# EAGLE board nano-addon-board (EAGLE 9.0.1)
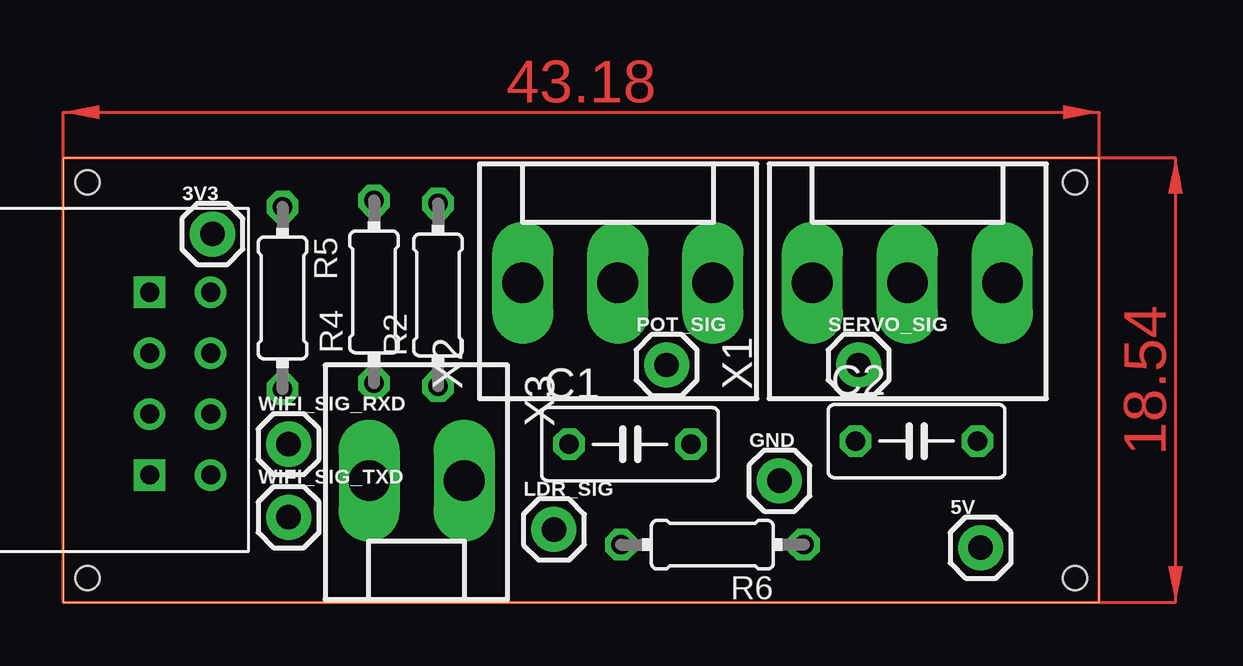
[diagram p0: board, top side]
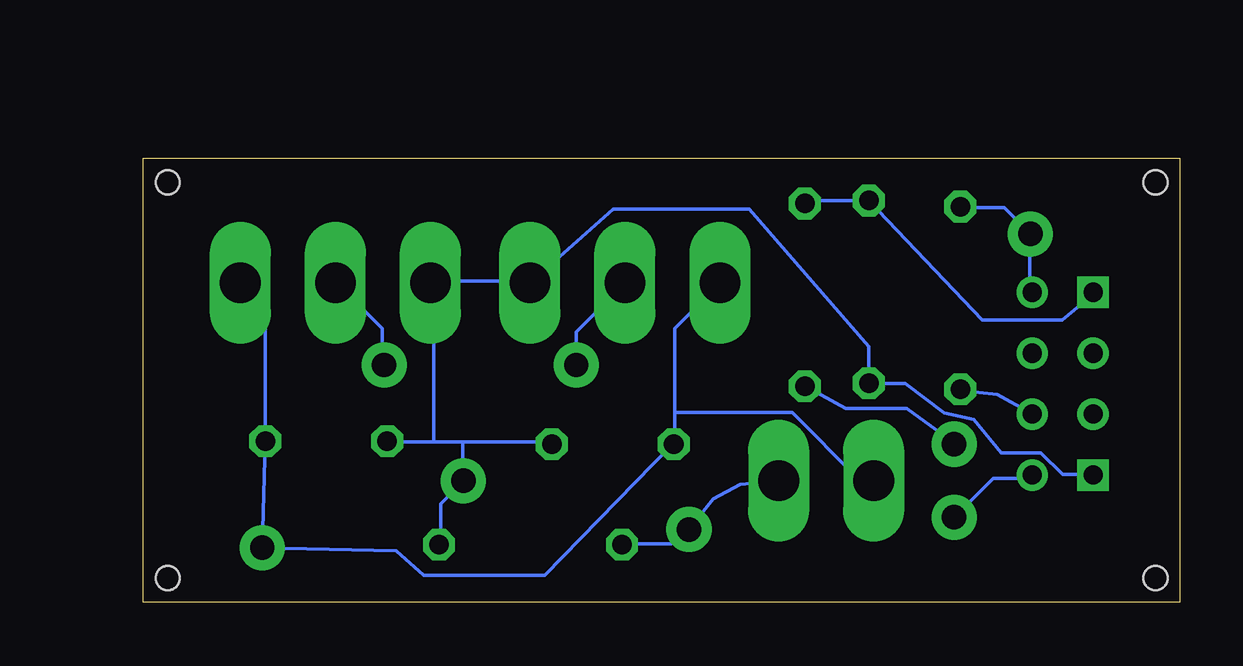
[diagram p1: board, bottom side, seen from below]

Size 43.18 x 18.53 mm. Coordinates in mm from the lower left corner, seen from the top.
Outline: 0,0 43.18,0 43.18,18.53 0,18.53 0,0
Copper layers (1*16): Top 0.035mm / dielectric 1.5mm / Bottom 0.035mm
Design rules "default *": minimum track width 6mil, minimum drill 0.3mm, track to track 6mil, track to pad 6mil, pad to pad 6mil, via to via 6mil, smd to smd 6mil, copper to edge 40mil, drill to drill 6mil, minimum pad ring 10mil, minimum via ring 8mil, stop-mask expansion 4mil, vias tented up to drill 0mil, thermal gap 10mil
Net classes: 0 default: width 0.152 mm, drill 0.3 mm, clearance 0.152 mm
Holes 1 mm at 1.02,17.53 1.02,1.02 42.16,1.02 42.16,17.53

## Footprints (pad centres in the part's own frame; a part is rotated, then mirrored left to right if it is on the bottom)
1X01 = drill 1.016 pad 1.88: 1 0,0
C050-030X075 = drill 0.813 octagon: 1 -2.54,0; 2 2.54,0
0204/7 = drill 0.813 octagon: 1 -3.81,0; 2 3.81,0
ESP01 = drill 0.8: CH_PD -1.285,-8.178; GPIO0 1.255,-5.638; GPIO2 -1.285,-5.638; RST 1.255,-8.178; TX -3.825,-8.178; VCC 3.795,-8.178 | drill 0.8 square: GND -3.825,-5.638; RX 3.795,-5.638
KK-156-3 = drill 1.7 pad 2.184 long: 1 -3.96,0; 2 0,0; 3 3.96,0
KK-156-2 = drill 1.7 pad 2.184 long: 1 -1.98,0; 2 1.98,0

## Placement (x,y rotation side)
3V3  [1X01]  6.22,15.37 0 top
5V  [1X01]  38.23,2.29 0 top
C1  200uF  [C050-030X075]  23.62,6.6 0 top
C2  200uF  [C050-030X075]  35.56,6.73 0 top
GND  [1X01]  29.84,5.08 0 top
LDR_SIG  [1X01]  20.45,3.05 0 top
POT_SIG  [1X01]  25.15,9.91 0 top
R2  1k  [0204/7]  15.62,12.83 90 top
R4  2k  [0204/7]  12.95,12.95 90 top
R5  10k  [0204/7]  9.14,12.7 270 top
R6  [0204/7]  27.05,2.41 180 top
SERVO_SIG  [1X01]  33.15,9.91 0 top
U$1  ESP8266  [ESP01]  -2.03,9.14 90 top
WIFI_SIG_RXD  [1X01]  9.4,6.6 0 top
WIFI_SIG_TXD  [1X01]  9.4,3.56 0 top
X1  [KK-156-3]  35.18,13.34 0 top
X2  [KK-156-3]  23.11,13.34 0 top
X3  [KK-156-2]  14.73,5.08 180 top

## Library data of the parts
3V3 5V GND LDR_SIG POT_SIG SERVO_SIG WIFI_SIG_RXD WIFI_SIG_TXD = SparkFun-Connectors
C1 C2 = resistor
R2 R4-R6 = eagle-ltspice; SPICEMODEL: NONE; SPICEPREFIX: R
U$1 = esp8266modules
X1-X3 = con-molex; MF: MOLEX; OC_FARNELL: unknown; OC_NEWARK: unknown

## Nets
3.3V: 3V3.1 R5.1 U$1.VCC
+5V: 5V.1 C1.1 C2.2 X1.3 X2.1 X3.2
GND: C1.2 C2.1 GND.1 R4.1 R6.1 U$1.GND X1.1 X2.3
LDR_SIG: LDR_SIG.1 R6.2 X3.1
N$1: POT_SIG.1 X2.2
N$6: R5.2 U$1.CH_PD
N$8: R2.2 R4.2 U$1.RX
SERVO_SIG: SERVO_SIG.1 X1.2
WIFI_SIG_RXD: R2.1 WIFI_SIG_RXD.1
WIFI_SIG_TXD: U$1.TX WIFI_SIG_TXD.1

## Tracks (layer width: path | path; a pad name or v marks a point on that pad's centre or on a via)
3.3V
  Bottom 0.152: U$1.VCC 6.25,12.95 6.25,15.24 3V3.1 7.32,16.46 9.14,16.46 R5.1
+5V
  Bottom 0.152: 21.03,7.92 21.03,11.43 19.2,13.26 X2.1 | 21.03,7.92 21.03,6.71 C1.1 21.18,6.55 26.47,1.14 31.5,1.14 32.64,2.16 5V.1 C2.2 38.1,12.34 39.01,13.26 X1.3 | 21.03,7.92 16.15,7.92 13.41,5.18 12.8,5.18 X3.2
GND
  Bottom 0.152: U$1.GND 3.66,5.33 4.88,5.33 5.79,6.25 7.44,6.25 8.59,7.64 9.8,7.9 11.43,9.14 R4.1 12.95,10.67 17.93,16.41 23.6,16.41 26.98,13.41 X2.3 27.13,13.41 31.09,13.41 X1.1 31.09,13.26 31.09,6.71 | 31.09,6.71 32.92,6.71 C2.1 33.07,6.71 | 31.09,6.71 29.87,6.71 | 29.87,6.71 26.21,6.71 C1.2 | 29.87,6.71 29.87,5.18 GND.1 29.87,5.03 30.79,4.12 30.79,2.44 R6.1
LDR_SIG
  Bottom 0.152: R6.2 23.16,2.44 21.18,2.44 20.57,3.05 LDR_SIG.1 19.43,4.32 18.31,4.93 X3.1
N$1
  Bottom 0.152: POT_SIG.1 25.15,11.28 23.16,13.26 X2.2
N$6
  Bottom 0.152: U$1.CH_PD 6.25,7.92 7.59,8.69 9.14,8.84 R5.2
N$8
  Bottom 0.152: U$1.RX 3.66,12.8 4.9,11.79 8.23,11.79 R4.2 15.54,16.76 R2.2
SERVO_SIG
  Bottom 0.152: SERVO_SIG.1 33.22,9.91 33.22,11.43 35.05,13.26 X1.2
WIFI_SIG_RXD
  Bottom 0.152: 15.7,8.99 R2.1 15.54,8.99 13.92,8.1 11.38,8.1 9.45,6.71 WIFI_SIG_RXD.1
WIFI_SIG_TXD
  Bottom 0.152: WIFI_SIG_TXD.1 7.77,5.18 6.25,5.18 U$1.TX
(copper drawn outside any net)
  shapes: Top area x2